# EAGLE board 808_bass_drum1 (EAGLE 9.0.0)
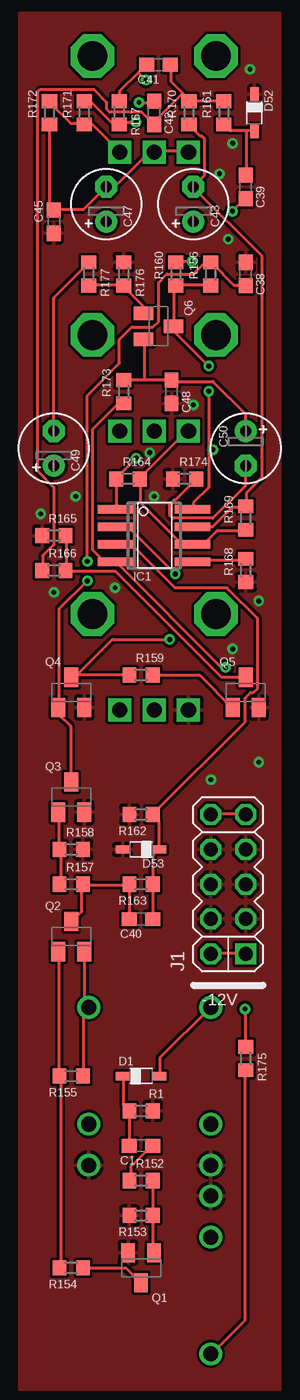
[diagram p0: board, top side]
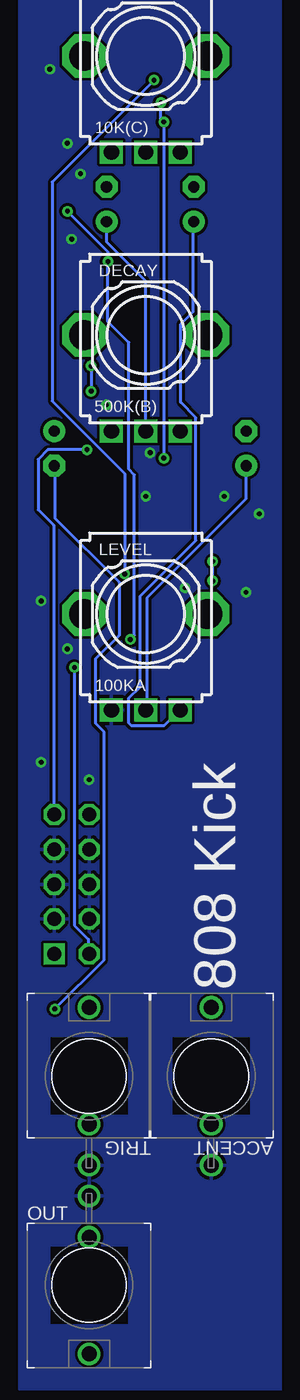
[diagram p1: board, bottom side, seen from below]

No outline drawn. Coordinates in mm, seen from the top.
Copper layers (1*16): Top 0.035mm / dielectric 1.5mm / Bottom 0.035mm
Design rules "default": minimum track width 6mil, minimum drill 0.35mm, track to track 6mil, track to pad 6mil, pad to pad 6mil, via to via 6mil, smd to smd 6mil, copper to edge 40mil, drill to drill 6mil, minimum pad ring 10mil, minimum via ring 8mil, stop-mask expansion 4mil, vias tented up to drill 0mil, thermal gap 10mil
Net classes: 0 default: width 0.203 mm, drill 0.356 mm, clearance 0.203 mm; 1 GND: width 0.203 mm, drill 0.356 mm, clearance 0.203 mm

## Footprints (pad centres in the part's own frame; a part is rotated, then mirrored left to right if it is on the bottom)
WQP-PJ301M-12_JACK = drill 1.1: P$1_TIP 0,5; P$2_SWITCH 0,-3.5; P$3_SLEEVE 0,-6.5
C0603 = smd 1.1 x 1: 1 -0.85,0; 2 0.85,0
E2,5-5 = drill 0.813 pad 1.6: + -1.27,0 | drill 0.813 pad 1.6 octagon: - 1.27,0
SOD323W_INFINEON = smd 1 x 0.6: A 1.35,0; C -1.35,0
9MM_PLS = drill 1.1 pad 1.676 square: 1 -2.5,-7; 2 0,-7; 3 2.5,-7 | drill 2.159 pad 3.175 octagon: M1 4.5,0; M2 -4.5,0
SO08 = smd 0.6 x 2.6: 1 -1.905,-2.8; 2 -0.635,-2.8; 3 0.635,-2.8; 4 1.905,-2.8; 5 1.905,2.8; 6 0.635,2.8; 7 -0.635,2.8; 8 -1.905,2.8
2X05_EUROPWR_OPEN = drill 1.016 square: 1 -5.08,-1.27 | drill 1.016 octagon: 2 -5.08,1.27; 3 -2.54,-1.27; 4 -2.54,1.27; 5 0,-1.27; 6 0,1.27; 7 2.54,-1.27; 8 2.54,1.27; 9 5.08,-1.27; 10 5.08,1.27
SOT23-BEC = smd 1 x 1.4: B -0.95,-1.1; C 0,1.1; E 0.95,-1.1
R0603 = smd 1 x 1.1: 1 -0.85,0; 2 0.85,0

## Placement (x,y rotation side)
ACCENT  JACK_THONKICONNNEW  [WQP-PJ301M-12_JACK]  5.08,22.86 0 bottom
C1  0.1  [C0603]  8.89,17.78 0 top
C38  100n  [C0603]  16.51,81.28 90 top
C39  33n  [C0603]  16.51,87.63 90 top
C40  15n  [C0603]  8.89,34.29 0 top
C41  15n  [C0603]  10.16,96.52 0 top
C42  15n  [C0603]  9.84,93.03 90 top
C43  33/6.3  [E2,5-5]  12.7,86.36 90 top
C45  100n  [C0603]  2.54,85.09 270 top
C47  .47/50  [E2,5-5]  6.35,86.36 90 top
C48  220p  [C0603]  11.11,72.71 90 top
C49  .47/50  [E2,5-5]  2.54,68.58 90 top
C50  1/50  [E2,5-5]  16.51,68.58 270 top
D1  1N4148  [SOD323W_INFINEON]  8.89,22.86 0 top
D52  1N4148  [SOD323W_INFINEON]  17.14,93.03 270 top
D53  1N4148  [SOD323W_INFINEON]  8.89,39.37 180 top
DECAY  500K(B)  [9MM_PLS]  9.84,76.83 0 bottom
IC1  OPAMP-TL072D  [SO08]  9.84,62.23 270 top
J1  HEADER-EUROPWR_2X05-OPEN  [2X05_EUROPWR_OPEN]  15.24,36.83 90 top
LEVEL  100KA  [9MM_PLS]  9.84,56.52 0 bottom
OUT  JACK_THONKICONNNEW  [WQP-PJ301M-12_JACK]  13.97,7.62 180 bottom
Q1  bc546  [SOT23-BEC]  8.89,8.89 180 top
Q2  bc556  [SOT23-BEC]  3.81,33.02 0 top
Q3  bc546  [SOT23-BEC]  3.81,43.18 0 top
Q4  bc546  [SOT23-BEC]  3.81,50.8 0 top
Q5  bc546  [SOT23-BEC]  16.51,50.8 0 top
Q6  bc546  [SOT23-BEC]  10.16,77.47 270 top
R1  100K  [R0603]  8.89,20.32 180 top
R152  22K  [R0603]  8.89,15.24 180 top
R153  10K  [R0603]  8.89,12.7 0 top
R154  10K  [R0603]  3.81,8.89 0 top
R155  4K7  [R0603]  3.81,22.86 0 top
R156  1M  [R0603]  13.97,81.28 270 top
R157  8K2  [R0603]  3.81,36.83 180 top
R158  2K7  [R0603]  3.81,39.37 180 top
R159  100K  [R0603]  8.89,52.07 180 top
R160  22K  [R0603]  11.43,81.28 270 top
R161  1M  [R0603]  14.92,93.03 270 top
R162  4K7  [R0603]  8.89,41.91 0 top
R163  100K  [R0603]  8.89,36.83 0 top
R164  47K  [R0603]  7.94,66.36 180 top
R165  47K  [R0603]  2.54,62.23 180 top
R166  6K8  [R0603]  2.54,59.69 180 top
R167  1M  [R0603]  7.3,93.03 90 top
R168  22K  [R0603]  16.51,59.69 270 top
R169  47K  [R0603]  16.51,63.5 270 top
R170  470K  [R0603]  12.38,93.03 270 top
R171  220R  [R0603]  4.76,93.03 270 top
R172  10K  [R0603]  2.22,93.03 270 top
R173  6K8  [R0603]  7.62,72.71 270 top
R174  100K  [R0603]  12.06,66.36 180 top
R175  1K  [R0603]  16.51,24.13 90 top
R176  100K  [R0603]  7.62,81.28 90 top
R177  82K  [R0603]  5.08,81.28 90 top
TONE  10K(C)  [9MM_PLS]  9.84,97.16 0 bottom
TRIG  JACK_THONKICONNNEW  [WQP-PJ301M-12_JACK]  13.97,22.86 0 bottom

## Library data of the parts
ACCENT C1 C38-C43 C45 C47-C50 D1 D52 D53 DECAY IC1 J1 LEVEL OUT Q1-Q6 R1 R152-R177 TONE TRIG = 0000-master

## Nets
+12V [GND]: IC1.8 J1.9 J1.10 Q6.C R156.2 R160.2
-12V [GND]: IC1.4 J1.1 J1.2 R173.2
C49: C49.- R177.2
GND [GND]: ACCENT.P$3_SLEEVE C38.2 C45.2 C48.1 D52.C D53.A J1.3 J1.4 J1.5 J1.6 J1.7 J1.8 LEVEL.1 OUT.P$3_SLEEVE Q1.E Q3.E Q4.E Q5.E R1.1 R153.1 R158.1 R162.1 R165.2 R168.2 R174.2 R176.2 TRIG.P$3_SLEEVE
N$1: DECAY.1 IC1.6 R164.1 R169.2
N$2: IC1.5 R168.1
N$3: OUT.P$1_TIP R175.1
N$4: D1.A TRIG.P$1_TIP
N$5: C1.1 D1.C R1.2
N$6: C1.2 R152.2
N$162: C38.1 Q3.C Q4.B R156.1
N$164: Q2.B R154.1 R155.1
N$168: Q5.C R165.1 R166.1
N$169: Q3.B R157.2 R158.2
N$188: Q1.C R154.2
N$190: C39.1 Q4.C R159.2 R160.1
N$191: C40.1 Q2.C R157.1 R163.1
N$192: C40.2 D53.C IC1.3 R162.2 R163.2
N$193: Q5.B R159.1
N$195: C41.2 C42.1 R161.1 R166.2 R170.1
N$196: C41.1 IC1.2 R167.2
N$197: C42.2 IC1.1 R164.2 R167.1 R171.1
N$198: C45.1 C47.- R172.2 TONE.1 TONE.2
N$199: R171.2 R172.1 TONE.3
N$202: C43.- IC1.7 R169.1 R170.2
N$203: Q6.B R176.1 R177.1
N$204: C48.2 C50.+ Q6.E R173.1
N$205: C50.- R174.1 R175.2
N$206: C47.+ LEVEL.3
N$207: C49.+ LEVEL.2
N$208: C43.+ DECAY.2
N$217: Q1.B R152.1 R153.2
N$242: C39.2 D52.A R161.2
TRIG: ACCENT.P$1_TIP Q2.E R155.2

## Tracks (layer width: path | path; a pad name or v marks a point on that pad's centre or on a via)
+12V  (via drill 0.36)
  Top 0.203: J1.10 14.02,41.96 16.46,41.96 J1.9 | R156.2 13.92,80.47 11.48,80.47 R160.2 11.38,80.37 11.28,80.26 11.28,77.52 Q6.C 11.28,77.42 11.28,77.11 v13.82,74.57 | v13.82,72.75 13.82,68.48 | 13.82,68.48 13.82,65.73 12.7,64.62 12.7,64.21 IC1.8 | 13.82,68.48 v14.12,68.48
  Bottom 0.203: v13.82,74.57 v13.82,72.75 | v14.12,68.48 16.97,68.48 17.68,67.77 17.68,64.11 16.56,62.99 16.56,41.96 J1.9
-12V  (via drill 0.36)
  Top 0.203: J1.2 14.02,31.8 16.46,31.8 J1.1 | R173.2 7.62,71.83 7.21,71.83 5.38,70 5.38,61.16 6.2,60.35 7.01,60.35 IC1.4 7.11,60.25 14.73,52.63 v15.04,52.63
  Bottom 0.203: v15.04,52.63 15.04,33.83 14.02,32.82 14.02,31.8 J1.2
C49
  Top 0.203: C49.- 2.54,79.55 5.08,82.09 R177.2
GND  (via drill 0.35)
  other vias: 17.46,57.47 15.56,53.98 17.46,45.72 13.97,44.45 1.59,63.82 2.54,58.1 4.13,65.09 6.99,58.42 16.83,96.2 15.56,90.81 14.61,88.58 15.24,83.82 12.7,71.75 9.53,68.26 9.84,65.09
  pour Top: 0,0 19.05,0 19.05,100.33 0,100.33
  pour Bottom: 0,0 19.05,0 19.05,101.6 0,101.6
N$1
  Top 0.203: R169.2 16.46,62.59 14.43,62.59 13.51,61.67 12.7,61.67 IC1.6 12.6,61.67 11.79,61.67 8.84,64.62 8.84,66.34 R164.1 8.84,66.45 12.29,69.9 DECAY.1
N$2
  Top 0.203: R168.1 16.46,60.45 12.8,60.45 12.7,60.35 IC1.5
N$3
  Top 0.203: R175.1 16.46,23.27 16.46,5.08 14.02,2.64 OUT.P$1_TIP
N$4
  Top 0.203: D1.A 10.26,22.86 10.26,24.18 13.92,27.84 TRIG.P$1_TIP
N$5
  Top 0.203: 8.03,20.32 7.62,20.73 7.62,22.86 D1.C | 8.03,20.32 8.03,17.78 C1.1 | 8.03,20.32 R1.2
N$6
  Top 0.203: R152.2 8.13,15.24 8.13,16.26 9.65,17.78 C1.2
N$162  (via drill 0.36)
  Top 0.203: C38.1 16.46,80.47 15.65,80.47 14.02,82.09 R156.1 13.92,82.09 13.51,82.09 12.7,81.28 10.77,81.28 10.16,80.67 10.16,77.83 9.75,77.42 8.23,77.42 7.32,76.5 7.32,74.78 4.98,72.44 v4.98,60.35 | Q3.C 3.76,44.3 3.76,48.36 2.95,49.17 2.95,49.68 Q4.B 2.95,49.78 2.95,56.9 v4.98,58.93
  Bottom 0.203: v4.98,58.93 v4.98,60.35
N$164
  Top 0.203: R154.1 3.05,8.94 3.05,22.86 R155.1 2.95,22.86 2.95,31.9 Q2.B
N$168
  Top 0.203: R165.1 3.45,62.18 3.45,59.74 R166.1 3.45,59.64 7.01,59.64 14.73,51.92 16.46,51.92 Q5.C
N$169
  Top 0.203: R157.2 3.05,36.88 3.05,39.32 R158.2 2.95,39.42 2.95,42.06 Q3.B
N$188
  Top 0.203: R154.2 4.67,8.84 7.82,8.84 8.84,7.82 Q1.C
N$190  (via drill 0.36)
  Top 0.203: v12.6,82.19 11.48,82.19 R160.1 | v15.54,85.85 16.46,86.77 C39.1 | 3.86,51.82 Q4.C 3.96,51.82 4.01,51.87 4.22,52.07 | v10.97,54.66 6.81,54.66 4.22,52.07 | R159.2 4.22,52.07
  Bottom 0.203: v15.54,85.85 12.6,82.91 v12.6,82.19 12.6,77.83 11.07,76.3 11.07,67.06 10.67,66.65 10.67,54.97 v10.97,54.66
N$191
  Top 0.203: C40.1 8.03,34.34 8.03,36.78 R163.1 7.92,36.78 4.67,36.78 R157.1 4.57,36.78 4.57,34.85 3.86,34.14 Q2.C
N$192
  Top 0.203: C40.2 9.75,34.34 9.75,36.78 R163.2 9.75,36.88 9.75,38.91 10.16,39.32 D53.C 10.16,39.42 10.16,41.45 9.75,41.86 R162.2 9.75,41.96 16.46,48.67 16.46,50.39 16.87,50.8 17.07,50.8 17.37,51.1 17.37,56.19 15.14,58.42 11.38,58.42 8.23,61.57 7.11,61.57 IC1.3
N$193
  Top 0.203: Q5.B 15.54,49.68 13.16,52.07 R159.1
N$195
  Top 0.203: R161.1 14.83,93.88 12.39,93.88 R170.1 12.39,93.98 11.94,94.44 | 11.94,94.44 11.07,95.3 11.07,96.52 C41.2 | 9.75,92.25 8.94,93.07 6.6,93.07 6.4,93.27 6.4,93.78 5.49,94.69 1.52,94.69 1.32,94.49 1.32,66.95 2.54,65.73 2.54,61.57 1.73,60.76 1.73,59.74 R166.2 | 9.75,92.25 11.94,94.44 | 9.75,92.25 C42.1
N$196  (via drill 0.36)
  Top 0.203: 8.69,95.96 9.25,96.52 C41.1 | 8.69,95.96 7.32,94.59 7.32,93.88 R167.2 | v11.38,59.44 8.03,62.79 7.11,62.79 IC1.2 | 8.69,95.96 v9.25,95.4
  Bottom 0.203: v11.38,59.44 11.38,66.75 16.66,72.03 16.66,87.99 v9.25,95.4
N$197  (via drill 0.36)
  Top 0.203: IC1.1 7.11,64.21 7.11,66.34 R164.2 7.11,66.45 v8.53,67.87 | R171.1 4.78,93.78 5.28,93.78 6.81,92.25 7.21,92.25 R167.1 7.21,92.35 v8.53,92.35 | v8.74,93.78 9.75,93.78 C42.2
  Bottom 0.203: v8.74,93.78 8.74,92.56 v8.53,92.35 v8.53,67.87
N$198
  Top 0.203: TONE.1 12.29,90.22 9.86,90.22 TONE.2 9.75,90.12 9.45,90.12 7.01,87.68 6.4,87.68 C47.- 4.67,85.95 2.54,85.95 | 2.54,85.95 2.23,86.26 2.23,92.15 R172.2 | 2.54,85.95 C45.1
N$199
  Top 0.203: R172.1 2.23,93.78 3.76,92.25 4.67,92.25 R171.2 4.78,92.15 5.38,92.15 7.32,90.22 TONE.3
N$202
  Top 0.203: IC1.7 12.7,62.89 14.12,62.89 15.54,64.31 16.46,64.31 R169.1 16.56,64.41 16.56,65.33 17.68,66.45 17.68,82.6 12.7,87.58 C43.- 12.7,87.68 13.51,88.49 13.51,91.14 13.31,91.34 13.21,91.34 12.39,92.15 R170.2
N$203
  Top 0.203: R177.1 5.08,80.47 7.62,80.47 R176.1 7.62,80.37 9.04,78.94 9.04,78.44 Q6.B
N$204
  Top 0.203: 9.14,73.56 11.07,73.56 C48.2 11.18,73.46 14.12,73.46 16.46,71.12 16.46,69.9 C50.+ | 9.14,73.56 R173.1 | R173.1 | 9.14,73.56 9.14,76.5 Q6.E
N$205  (via drill 0.36)
  Top 0.203: v16.46,27.74 16.46,24.99 R175.2 | R174.1 12.9,66.34 11.38,64.82 11.28,64.82 10.97,64.52 10.97,63.7 11.18,63.5 14.12,63.5 16.46,65.84 16.46,67.26 C50.-
  Bottom 0.203: v16.46,27.74 12.9,31.29 12.9,47.95 13.51,48.56 13.51,53.24 11.79,54.97 11.79,58.83 16.46,63.5 16.46,67.26 C50.-
N$206
  Bottom 0.203: C47.+ 6.4,85.04 6.4,78.54 7.32,77.62 7.32,71.93 6.2,70.81 6.2,61.87 10.26,57.81 10.26,51.21 11.07,50.39 11.07,48.56 10.87,48.36 8.53,48.36 7.42,49.48 LEVEL.3
N$207
  Bottom 0.203: C49.+ 2.54,64.92 9.75,57.71 9.75,49.58 LEVEL.2
N$208
  Bottom 0.203: C43.+ 12.7,83.62 9.86,80.77 9.86,69.9 DECAY.2
N$217
  Top 0.203: 9.75,12.7 9.75,15.24 R152.1 | 9.75,12.7 9.75,10.06 Q1.B | 9.75,12.7 R153.2
N$242
  Top 0.203: 16.56,91.75 15.34,91.75 14.94,92.15 R161.2 | 16.56,91.75 17.07,91.75 D52.A | 16.56,91.75 16.56,88.49 C39.2
TRIG
  Top 0.203: R155.2 4.67,22.86 4.67,27.43 5.08,27.84 ACCENT.P$1_TIP 5.08,27.94 4.78,28.25 4.78,31.9 Q2.E

## Text on the board
bNames: 808 Kick